# Altium PCB IFX9201_Core.PcbDoc
Units mil, origin at the board's own origin, x right, y up, seen from the top; angles counter-clockwise.
Board outline 1525.39 x 1529.67 mil, 3 copper layers (Top Layer, Mid-Layer 2, Bottom Layer); 16 components, 14 nets, 80 pads, 47 vias.
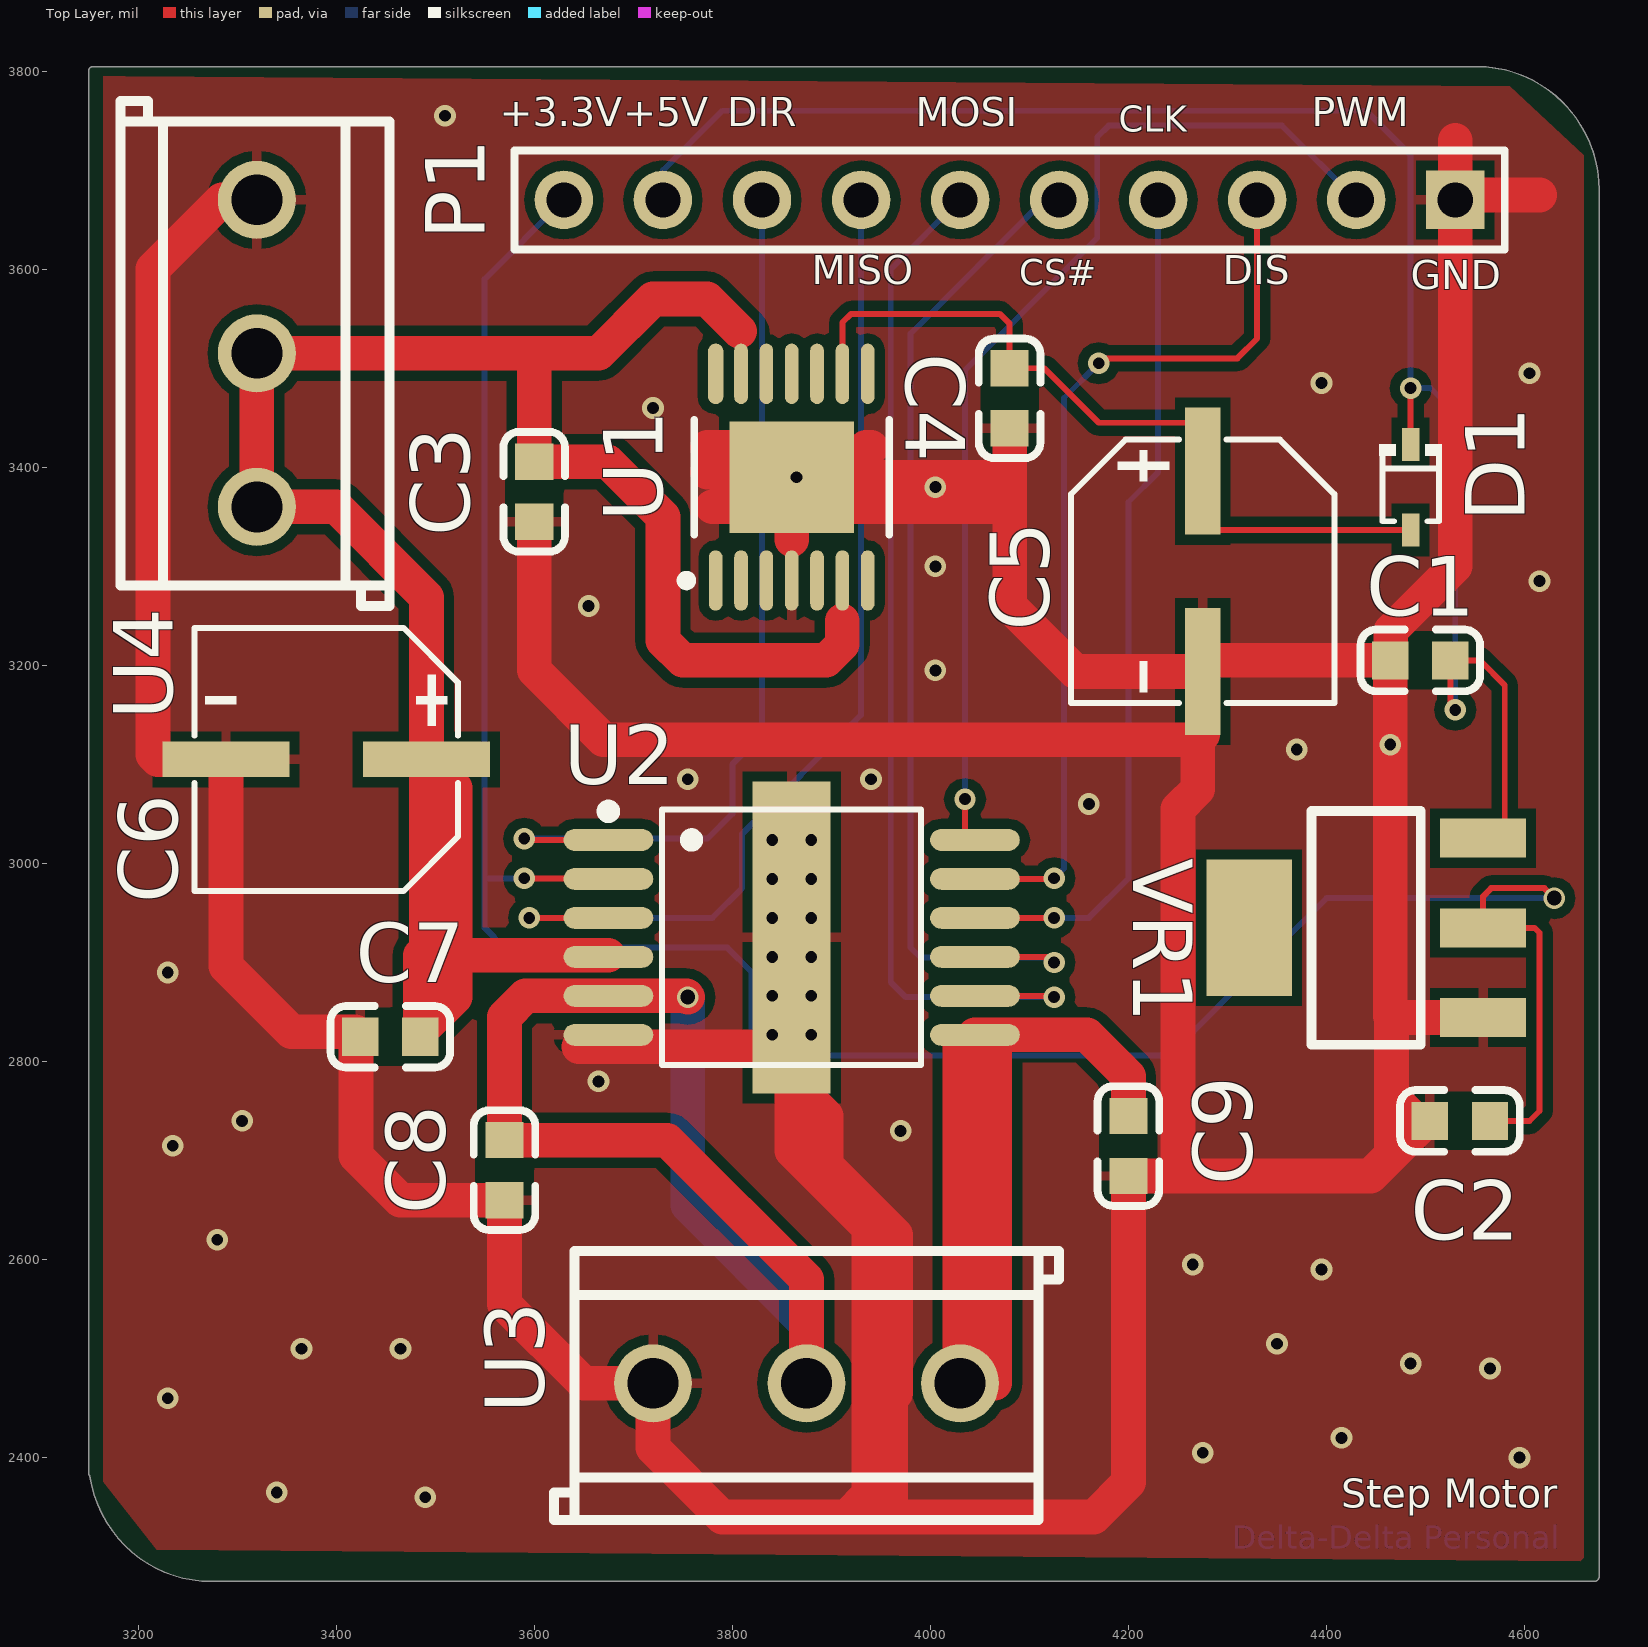
[diagram p0: Top Layer view]
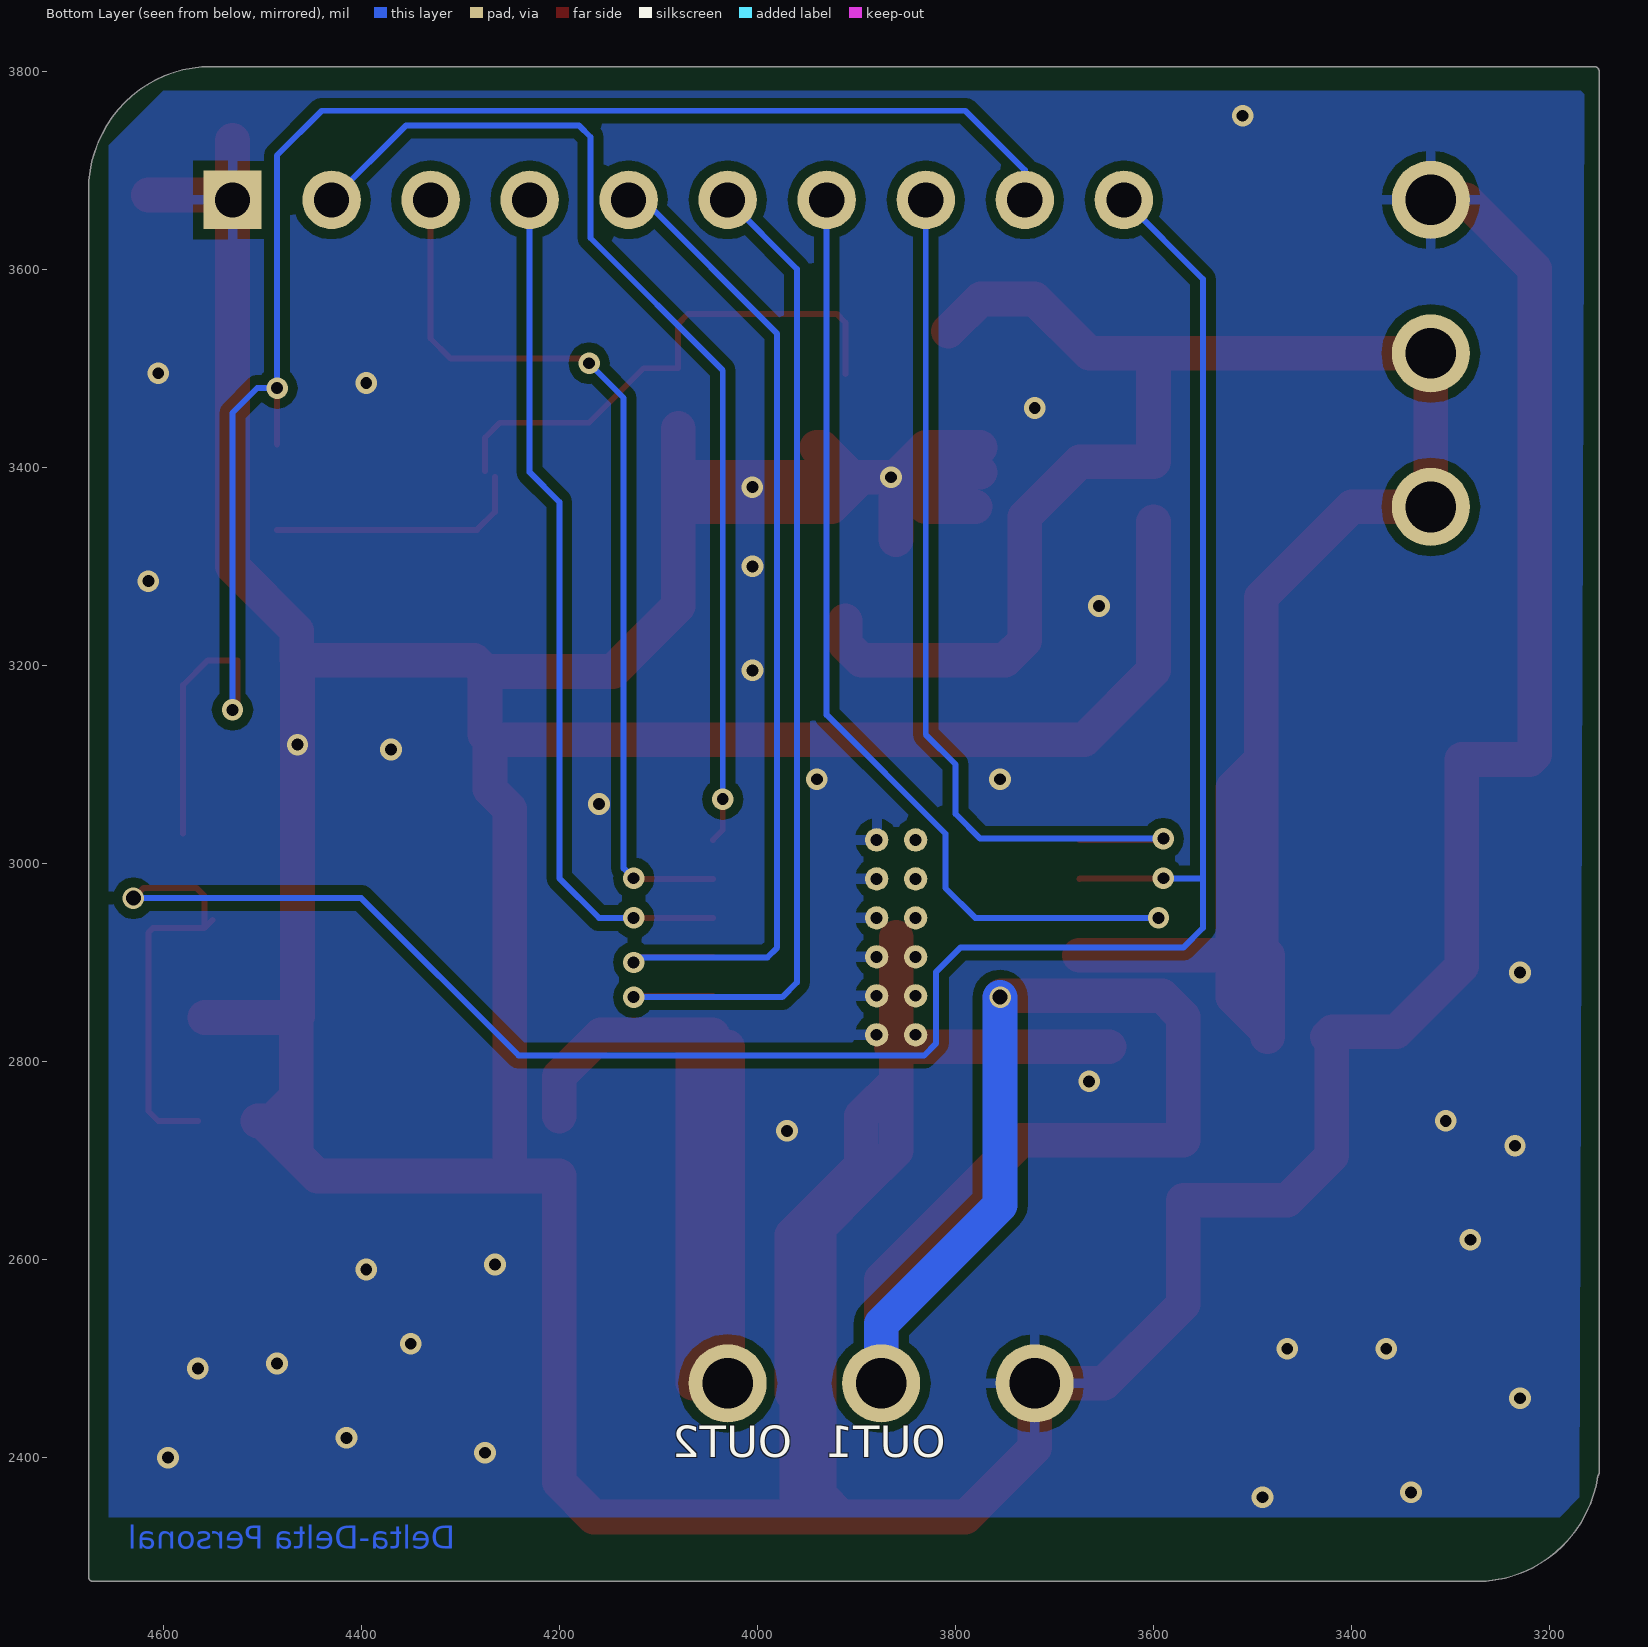
[diagram p1: Bottom Layer view, seen from below]
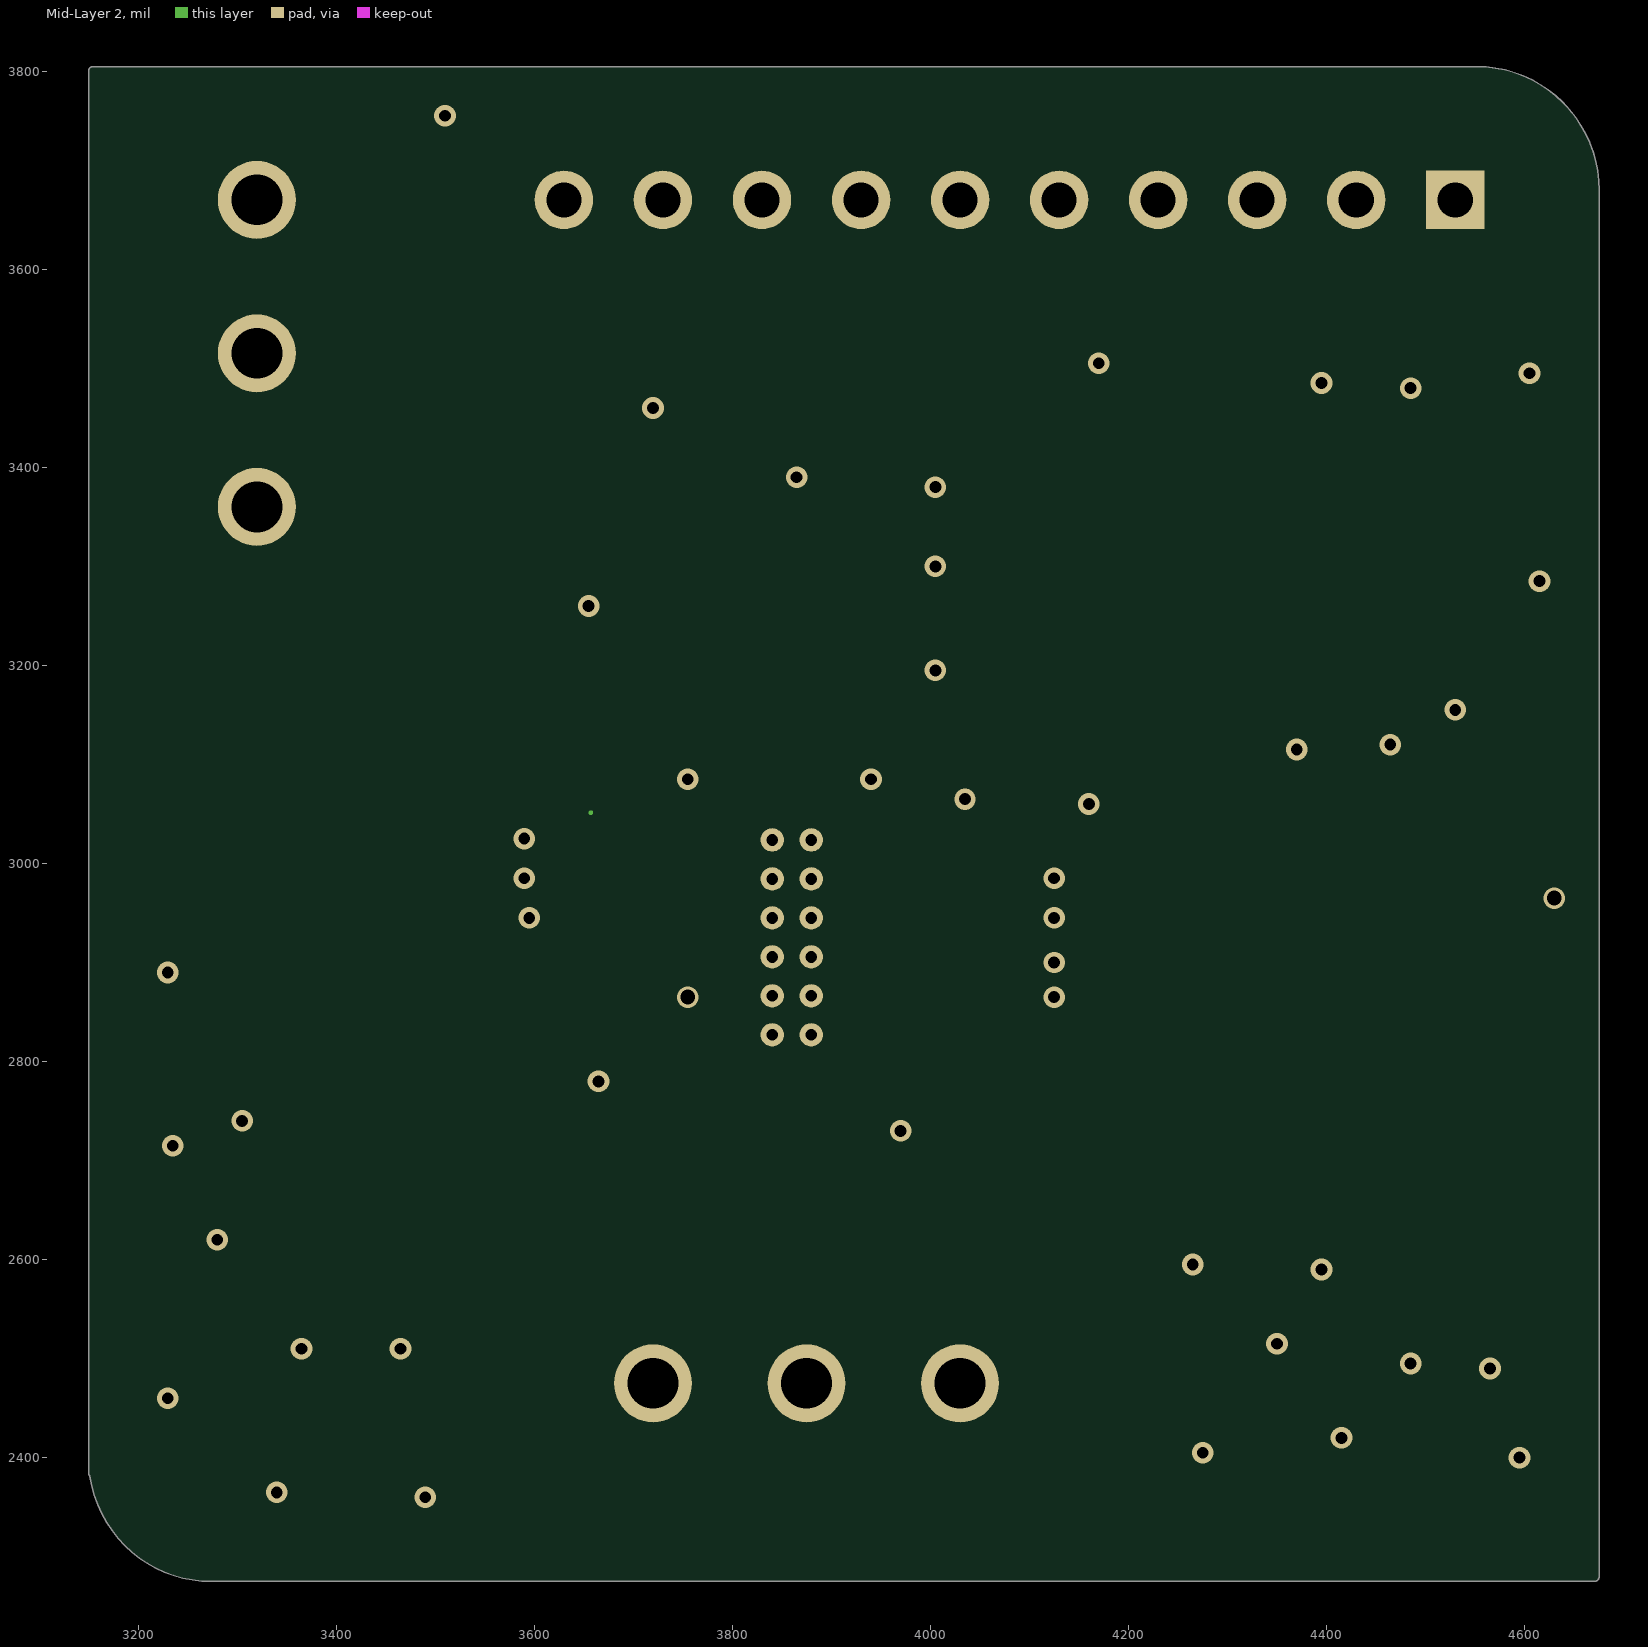
[diagram p2: Mid-Layer 2]
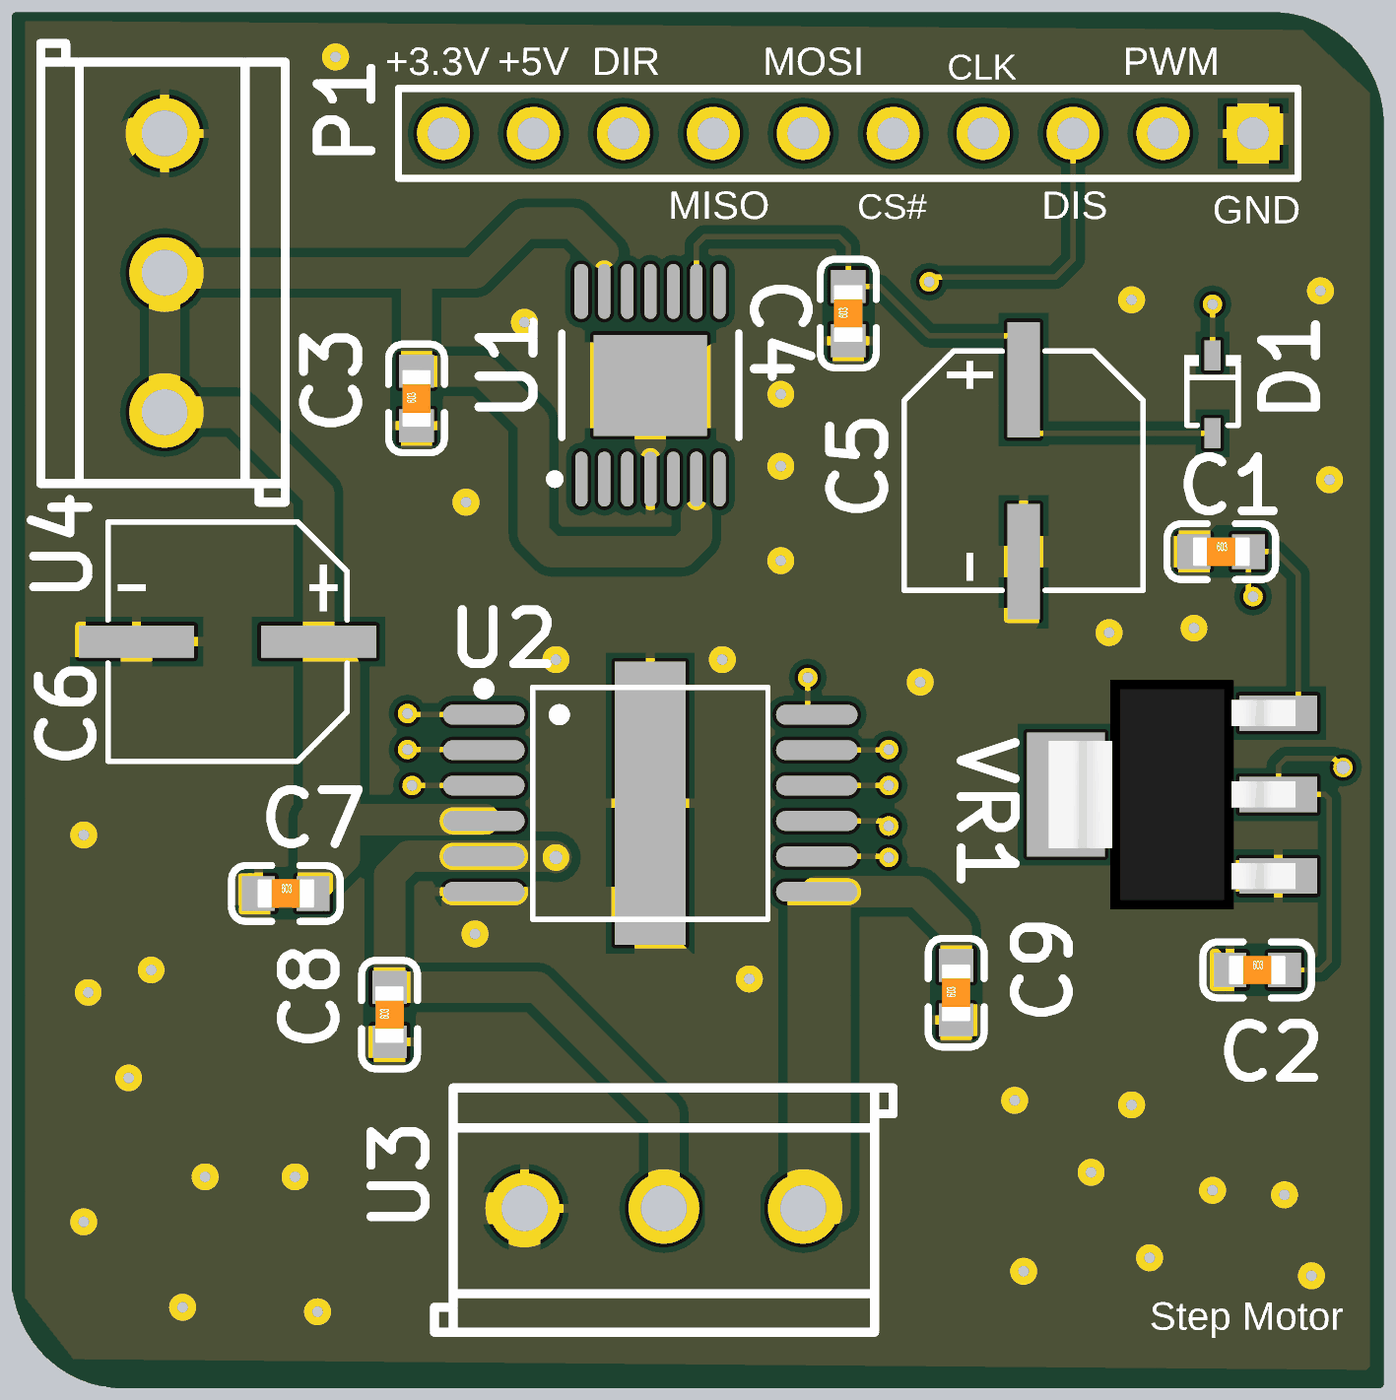
[diagram p3: 3D render of the assembled board from above, using the file's embedded part models]

## Layer stack, top to bottom
Top Solder: solder mask 0.4, Solder Resist, Dk 3.5
Top Layer: signal copper 1.4
Dielectric 1: dielectric 12.6, FR-4, Dk 4.8
Mid-Layer 2: signal copper 1.4
Dielectric2: dielectric 12.6, FR-4, Dk 4.8
Bottom Layer: signal copper 1.4
Bottom Solder: solder mask 0.4, Solder Resist, Dk 3.5

## Board outline
3151.34,2381.57 cw(c3155,2385) 3149.99,2385 3149.99,3799.64 cw(c3155,3799.64) 3155,3804.66 4551.36,3804.66 cw(c4551.36,3681.36) 4638.55,3768.55 cw(c4549.64,3679.64) 4675.37,3679.64 4675.37,2280 cw(c4670.36,2280) 4670.36,2274.99 3273.99,2274.99 cw(c3273.99,2398.28) 3186.81,2311.1 cw(c3275.71,2400)

## Design rules (kind name [scope] priority, off if disabled: settings)
Clearance [All] p1: gap=6 ignorepadtopadclearanceinfootprint=FALSE except(10: Arc-Fill Arc-Poly Arc-Region Track-Fill Track-Poly Track-Region SMDPad-Fill SMDPad-Poly SMDPad-Region THPad-Fill THPad-Poly THPad-Region Via-Fill Via-Poly Via-Region Fill-Fill Fill-Poly Fill-Region Poly-Poly Poly-Region Region-Region)
MinimumSolderMaskSliver [All] p1: minsoldermaskwidth=2
PolygonConnect [All] p1: thpad.connectstyle=Relief thpad.reliefconductorwidth=10 thpad.reliefentries=4 thpad.polygonreliefangle="90 Angle" thpad.airgapwidth=10 smdpad.connectstyle=Relief smdpad.reliefconductorwidth=10 smdpad.reliefentries=4 smdpad.polygonreliefangle="90 Angle" smdpad.airgapwidth=10 via.connectstyle=Direct via.reliefconductorwidth=10 via.reliefentries=4 via.polygonreliefangle="90 Angle" via.airgapwidth=10
RoutingVias [All] p1: holewidth=28 width=50 viastyle="Through Hole" minholewidth=28 minwidth=50 maxholewidth=28 maxwidth=50
SilkToSilkClearance [All] p1: silktosilkclearance=2
SilkToSolderMaskClearance [IsPad] p1: minsilkscreentomaskgap=0 clearancetoexposedcopper=TRUE
SolderMaskExpansion [All] p1: expansion=4
Width Power [InNetClass('Power')] p1: maxlimit=100 minlimit=30 preferedwidth=35
Width [All] p2: maxlimit=8 minlimit=6 preferedwidth=6
27 further rules are at their usual default settings.

## Classes and differential pairs
net class Power: AGND OUT1 OUT2 VS

## Components (designator, comment, footprint, x,y, rotation, side; value= is the part's Value field where it differs from the comment)
C1 "100nF" 0603_C 4494.69,3205 r0 top
C2 "100nF" 0603_C 4534.69,2740 r0 top
C3 "100nF" 0603_C 3600,3375.32 r90 top
C4 "100nF" 0603_C 4080,3469.68 r90 top
C5 "SMD6.3 100uF 16V" CAP-SMD_BD6.3-L6.6-W6.6-FD 4275,3295 r90 top
C6 "SMD 47uF 50V" CAP-SMD_BD6.3-L6.6-W6.6-FD 3390,3105 r0 top
C7 "100nF" 0603_C 3454.68,2825 r0 top
C8 "10nF" 0603_C 3570,2690.32 r90 top
C9 "10nF" 0603_C 4200,2714.68 r90 top
D1 "BAS3010A-03W E6327" SOD-323_L1.8-W1.3-LS2.5-RD 4485,3380 r270 top
P1 "Header 10" HDR1X10 4530,3670 r180 top
U1 "IFX24401EL V50" INF-PG-SSOP-14-1_N 3860,3390 r90 top
U2 "IFX9201SGAUMA1" SO-12_L6.4-W7.5-P1.00-LS10.3-BL-EP 3859.96,2925.31 r270 top
U3 "KF396-3.96-3P" CONN-TH_3P-P3.96_KF396-3.96-3P 3875,2475 r180 top
U4 "KF396-3.96-3P" CONN-TH_3P-P3.96_KF396-3.96-3P 3320,3515 r90 top
VR1 "AMS1117-3.3" SOT-223 4440,2935 r0 top

## Footprints (in the part's own frame and the unit in brackets; to place one, negate y for a bottom-side part, rotate by r counter-clockwise, add the part's x,y. Pads: shape width x height; smd on the part's side, far side on the other; paste and mask are expansions set on the pad)
0603_C [mm]
  rect 0.93x0.98 smd: 1(-0.77,0) 2(0.77,0)
  silkscreen extent -1.53,-0.79 1.54,0.79, body extent -0.8,-0.4 0.8,0.4, height 0.3
CAP-SMD_BD6.3-L6.6-W6.6-FD [mm]
  rect 3.26x0.91 smd: 1(2.57,0) 2(-2.57,0)
  silkscreen extent -3.38,-3.38 3.38,3.38
CONN-TH_3P-P3.96_KF396-3.96-3P [mm]
  round 2 hole 1.3: 1(-3.937,0) 2(0,0) 3(3.937,0)
  silkscreen extent -6.48,-3.4 6.48,3.5
HDR1X10 [mm] "Connector; Header; 10 Position"
  rect 1.5x1.5 hole 0.9: 1(0,0)
  round 1.5 hole 0.9: 2(2.54,0) 3(5.08,0) 4(7.62,0) 5(10.16,0) 6(12.7,0) 7(15.24,0) 8(17.78,0) 9(20.32,0) 10(22.86,0)
  silkscreen extent -1.27,-1.27 24.13,1.27
INF-PG-SSOP-14-1_N [mm] "SOP, 14-Leads, Body 4.9x3.9mm, Pitch 0.65mm, Thermal Pad 3.2x2.85mm, IPC Medium Density"
  oval 1.55x0.35 smd: 1(-2.65,1.95) 2(-2.65,1.3) 3(-2.65,0.65) 4(-2.65,0) 5(-2.65,-0.65) 6(-2.65,-1.3) 7(-2.65,-1.95) 8(2.65,-1.95) 9(2.65,-1.3) 10(2.65,-0.65) 11(2.65,0) 12(2.65,0.65) 13(2.65,1.3)
  oval 1.55x0.4 smd: 14(2.65,1.95)
  rect 2.85x3.2 smd: 15(0,0)
  silkscreen extent -2.77,-2.5 1.48,2.82, body extent -2,-2.5 2,2.5, height 1.7
SO-12_L6.4-W7.5-P1.00-LS10.3-BL-EP [mm]
  oval 0.56x2.3 smd: 1(-2.5,-4.7) 2(-1.5,-4.7) 3(-0.5,-4.7) 4(0.5,-4.7) 5(1.5,-4.7) 6(2.5,-4.7) 7(2.5,4.7) 8(1.5,4.7) 9(0.5,4.7) 10(-0.5,4.7) 11(-1.5,4.7) 12(-2.5,4.7)
  round 0.6 hole 0.3: 13(-2.5,-0.5) 13(-2.5,0.5) 13(-1.5,0.5) 13(-1.5,-0.5) 13(-0.5,0.5) 13(-0.5,-0.5) 13(0.5,0.5) 13(0.5,-0.5) 13(1.5,0.5) 13(1.5,-0.5) 13(2.5,-0.5) 13(2.5,0.5)
  rect 8x2 smd: 13(0,0)
  Mid-Layer 2 circle w0.06: c-3.2,-5.15 r0.03
  silkscreen extent -3.38,-4.85 3.28,3.32
SOD-323_L1.8-W1.3-LS2.5-RD [mm]
  rect 0.845x0.455 smd: 1(-1.098,0) 2(1.098,0)
  silkscreen extent -1.1,-0.8 0.88,0.8
SOT-223 [mm]
  rect 2.2x1 smd: 1(3,-2.3) 2(3,0) 3(3,2.3)
  rect 2.2x3.5 smd: 4(-3,0)
  silkscreen extent -1.4,-3 1.4,3, body extent -3.49,-3.24 3.49,3.24, height 1.64

## Part data
C1 C2 C3 C4 C7: library part "0603 2.7nF (272) 10% 50V", "GCJ188R72A104KA01D", Package=0603, ComponentLink1Description=muRata
C5: library part "SMD6.3 100uF", "UUD1C101MCL1GS", BOM_Manufacturer=Nichicon, BOM_Manufacturer Part=UUD1C101MCL1GS
C6: library part "SMD6.3 100uF", "EEEFT1H470AP", BOM_Manufacturer=PANASONIC, Package=SMD,6.3x5.8mm, BOM_Manufacturer Part=EEEFT1H470AP
C8 C9: library part "0603 2.7nF (272) 10% 50V", "GCM188R72A103KA37D", Package=0603, ComponentLink1Description=muRata
D1: BOM_Manufacturer="Infineon Technologies", BOM_Manufacturer Part="BAS 3010A-03W E6327"
P1: "Header, 10-Pin", LatestRevisionDate=17-Jul-2002, LatestRevisionNote="Re-released for DXP Platform.", Publisher="Altium Limited"
U1: "Low Dropout Voltage Regulator, 5.5?to 42?V Operating, 300 mA, -40 to 125?degC, PG-SSOP-14-1, Reel, Green", Dropout Voltage="250 mV", Manufacturer=Infineon, Max. Output Current="300 mA", Max Peak Reflow Temp=260?degC, Output Voltage="5 V", Supplier Part Number 1=726-IFX24401ELV50, Typical Quiescent Current="20 uA", Accuracy=2.0?%, Automotive Qualified=FALSE, ComponentLink1Description="Manufacturer URL", ComponentLink1URL=http://www.infineon.com/, ComponentLink2Description=Datasheet, ComponentLink2URL=http://www.infineon.com/dgdl/IFX24401_DS_102.pdf?folderId=db3a30431ff988150120802bce1d257a&fileId=db3a304320d39d590120f61fb4d269d5, ComponentLink3Description="Package Specification", ComponentLink3URL=http://www.infineon.com/dgdl/PG-SSOP-14-1%2C-2%2C-3-Package_Overview.pdf?folderId=db3a304319bc939a0119bdaa53bc000b&fileId=db3a30431cdffaa4011ce10d798a0009, DatasheetVersion="Rev. 1.02", Green=TRUE, Halogen-free=TRUE, Max Number Reflow=3, Mounting Technology="Surface Mount", MSL=3, PackageDescription="14-Pin Plastic (Green) Shrink Small Outline Package, 4.9 x 3.9 mm Body, 0.65 mm Pitch", PackageReference=PG-SSOP-14-1, PackageVersion=Oct-08, Packing=Reel, PartNumber="IFX24401EL V50", Regulator Type="Linear->single output", Reset=FALSE, Status Output=FALSE, Supplier 1=Mouser, Supplier 2=Digi-Key, Supplier 3=Digi-Key, Supplier 4=Digi-Key, Supplier Part Number 2="IFX24401EL V50INTR-ND", Supplier Part Number 3="IFX24401EL V50INCT-ND", Supplier Part Number 4="IFX24401EL V50INDKR-ND"
U2: BOM_Manufacturer=Infineon, BOM_Manufacturer Part=IFX9201SGAUMA1
U3 U4: BOM_Manufacturer="Cixi Kefa Elec", BOM_Manufacturer Part=KF396-3.96-3P, BOM_Supplier=LCSC, BOM_Supplier Part=C474895, Contributor=LCSC, spicePre=U, spiceSymbolName=KF396-3.96-3P
VR1: library part "SOT-223 AMS1117-3.3", "低压差线性稳压(LDO)", Package=SOT-223, SuppliersPartNumber=C6186, ComponentLink1Description=供应商链接, ComponentLink1URL=http://www.szlcsc.com/product/details_6652.html, Supplier=LC

## Via types
v1: diameter 22, hole 12, Top Layer to Bottom Layer, 29 vias
v2: diameter 21.65, hole 12, Top Layer to Bottom Layer, 16 vias
v3: diameter 21.65, hole 14.96, Top Layer to Bottom Layer, 2 vias

## Nets (pads, with @x,y where several pads share a name; then routed paths per layer and width w, separated by ;. In a path a pad name is that pad's centre, name@x,y a point inside that pad or via, vN(x,y) a via of type N, cw(c..) or ccw(c..) an arc to the next point about the centre after c; other vN are vias at no path point)
+3.3V: C2.2 P1.10 U2.2 VR1.2 | length 2550.7
  Top Layer w6: v2(3590,2985) 3674.29,2985 U2.2 ; VR1.2@4550,2943.11 VR1.2 ; C2.2 4605,2740 4615,2750 4615,2930 4610,2935 VR1.2 ; v3(4630,2965) 4620,2975 4566.22,2975 4558.11,2966.89 VR1.2
  Bottom Layer w6: v2(3590,2985) 3550,2985 ; P1.10 3550,3590 3550,2985 ; v3(4630,2965) 4400,2965 4241.07,2806.07 3831.65,2806.07 3819.46,2818.26 3819.46,2890.54 3795,2915 3570,2915 3550,2935 3550,2985
+5V: C1.2 D1.1 P1.9 VR1.3 | length 1743.1
  Top Layer w6: D1.1 v2(4485,3480) ; v2(4530,3155) 4525,3160 C1.2 4555,3205 4580,3180 VR1.3@4580,3030
  Bottom Layer w6: P1.9 3730,3700 3790,3760 4440,3760 4485,3715 v2(4485,3480) 4505,3480 4530,3455 v2(4530,3155)
AGND: C1.1 C2.1 C3.1 C4.1 C5.2 C6.2 C7.1 C8.1 C9.1 P1.1 U1.4 U1.15 U2.6 U2.13 U3.3 U4.3 VR1.1 | length 8307.7
  Top Layer w35: U4.3 3284.79,3670 3215,3600.21 3215,3110 3220,3105 C6.2 3288.82,2896.18 3355,2830 3419.37,2830 C7.1 3420,2820.63 3420,2705 3465,2660 C8.1 3570,2555 3650,2475 U3.3 3720,2410 3790,2340 3915,2340 ; C3.1 3600,3195 3670,3125 4270,3125 ; 3645,2815 U2.13@3859.96,2815 ; 3775,3395 U1.15@3855,3395 ; 3775,3420 3830,3420 U1.15@3855,3395 ; 3780,3360 3830,3360 U1.15 ; U2.13@3859.96,2925.32 U2.13@3859.96,2815 ; 3860,3326.68 U1.15 ; U2.13@3865,2815 U2.13@3859.96,2815 ; 3940,3420 3935,3420 3910,3395 U1.15@3910,3390 ; C4.1 4080,3385 ; C2.1 C2.1@4500,2740 ; 4530,3730 P1.1 ; VR1.1 4465.55,2844.45 ; 4615,3675 4535,3675 P1.1 ; U1.15@3855,3395 U1.15 ; U2.13@3859.96,2780.04 3895,2745 3895,2695 ; U2.13@3859.96,2780.04 U2.13@3859.96,2815 ; U2.13@3859.96,2780.04 3859.96,2710.04 3895,2675 ; U1.15 v1(3865,3390) U1.15@3895,3390 ; 3895,2675 3895,2695 ; 3895,2675 3937.87,2632.13 ; 3895,2695 3965,2625 3965,2605 ; U1.15@3895,3390 U1.15@3910,3390 ; U1.15@3895,3390 3925,3360 4080,3360 ; U1.15@3910,3390 4075,3390 4080,3385 ; 3915,2340 3960,2340 ; 3915,2340 3937.87,2362.87 3937.87,2632.13 ; 3937.87,2632.13 3965,2605 ; 3960,2340 4165,2340 4200,2375 C9.1 4250,2684.37 ; 3960,2340 3960,2460 3965,2465 3965,2605 ; 4080,3360 4080,3385 ; 4080,3360 4080,3260 4146.18,3193.82 C5.2 ; 4250,2684.37 4444.37,2684.37 4465.55,2705.55 ; 4250,2684.37 4250,3055 4270,3075 4270,3125 ; 4270,3125 4275,3130 C5.2 ; C5.2 4286.18,3205 C1.1 ; C1.1 v2(4464.37,3120) 4464.37,2845.63 4465.55,2844.45 ; C1.1 4465,3205.63 4465,3235 4530,3300 P1.1 ; 4465.55,2705.55 4465.55,2764.45 ; 4465.55,2705.55 C2.1@4500,2740 ; 4465.55,2764.45 4465.55,2844.45 ; 4465.55,2764.45 4490,2740 C2.1@4500,2740
  other v1: 3490,2360 3340,2365 4595,2400 4275,2405 4415,2420 3230,2460 4565,2490 4485,2495 3365,2510 3465,2510 4350,2515 4395,2590 4265,2595 3970,2730 3665,2780 3230,2890 4160,3060 3755,3085 3940,3085 4370,3115 4005,3195 3655,3260 4615,3285 4005,3300 3720,3460 4395,3485 4605,3495 3510,3755
  other v2: 3280,2620 3235,2715 3305,2740 4005,3380
CLK: P1.4 U2.10 | length 869
  Top Layer w6: U2.10 v2(4125,2945)
  Bottom Layer w6: v2(4125,2945) 4160,2945 4200,2985 4200,3365 4230,3395 P1.4
CS#: P1.5 U2.9 | length 1059.5
  Top Layer w6: U2.9 4119.37,2905.63 v2(4125,2900)
  Bottom Layer w6: v2(4125,2900) 4120,2905 3990,2905 3980,2915 3980,3535 4115,3670 P1.5
DIR: P1.8 U2.1 | length 938.2
  Top Layer w6: v2(3590,3025) 3591.26,3023.74 U2.1
  Bottom Layer w6: v2(3590,3025) 3775,3025 3800,3050 3800,3100 3830,3130 P1.8
DIS: P1.3 U2.11 | length 929.3
  Top Layer w6: U2.11 4124.37,2984.37 v2(4125,2985) ; v2(4170,3505) 4175,3510 4310,3510 4330,3530 P1.3
  Bottom Layer w6: v2(4125,2985) 4135,2995 4135,3470 v2(4170,3505)
MISO: P1.7 U2.3 | length 1052.1
  Top Layer w6: v2(3595,2945) U2.3
  Bottom Layer w6: v2(3595,2945) 3780,2945 3810,2975 3810,3030 3930,3150 P1.7
MOSI: P1.6 U2.8 | length 1070.7
  Top Layer w6: U2.8 4123.74,2866.26 v2(4125,2865)
  Bottom Layer w6: P1.6 3960,3600 3960,2880 3975,2865 v2(4125,2865)
NetC4_2: C4.2 C5.1 D1.2 U1.9 | length 793.8
  Top Layer w6: U1.9 3911.18,3546.18 3920,3555 4070,3555 4080,3545 C4.2 4115,3500 4170,3445 4260,3445 4275,3430 C5.1 ; C5.1@4265,3390 4265,3355 4283.21,3336.79 D1.2
OUT1: C8.2 U2.5 U3.2 | length 1226.7
  Top Layer w35: v3(3755,2865) 3753.74,2866.26 U2.5 3591.26,2866.26 3570,2845 C8.2 3734.37,2720.63 3875,2580 U3.2
  Bottom Layer w35: v3(3755,2865) 3755,2655 3875,2535 U3.2
OUT2: C9.2 U2.7 U3.1 | length 892.4
  Top Layer w35: U3.1 4030,2815 ; U2.7 4158.11,2826.89 4200,2785 C9.2 ; U3.1@4065,2475 4065,2815
PWM: P1.2 U2.12 | length 1066.5
  Top Layer w6: v2(4035,3065) 4035,3033.74 U2.12
  Bottom Layer w6: v2(4035,3065) 4035,3497.94 4168.53,3631.47 4168.53,3733.53 4180,3745 4355,3745 P1.2
VS: C3.2 C6.1 C7.2 U1.6 U1.13 U2.4 U4.1 U4.2 | length 2432.7
  Top Layer w35: C7.2 C7.2@3485,2830 ; U2.4@3674.92,2907.26 3520,2907.26 ; 3807.28,3537.28 3774.57,3570 3720,3570 3665,3515 3600,3515 ; 3911.18,3245 3911.18,3221.18 3895,3205 3750,3205 3730,3225 3730,3350 3674.37,3405.63 C3.2 3600,3515 ; C7.2@3485,2830 3485,2907.26 ; C7.2@3485,2830 3520,2865 3520,2907.26 ; 3485,2907.26 3520,2907.26 ; 3485,2907.26 3491.18,2913.44 C6.1 ; C6.1 3520,3076.18 3520,2907.26 ; C6.1 3491.18,3268.82 3400,3360 U4.1 U4.2 3600,3515
pads on no net: U1.1 U1.2 U1.3 U1.5 U1.7 U1.8 U1.10 U1.11 U1.12 U1.14 VR1.4

## Polygon pours and split planes (outlines as drawn)
AGND on Bottom Layer "Top Layer-No Net" (solid, remove dead copper, pour order 2): 3165,3780 4600,3780 4655,3725 4655,2340 3190,2340 3170,2360
AGND on Top Layer "Top Layer-No Net" (solid, remove dead copper, pour order 0): 3165,3795 3186.81,3795 4585,3785 4660,3715 4660,2295.37 3218.64,2307.18 3165,2375.46 3165,2418.3 3165,2555

## Other copper
Bottom Layer:
  text "Delta-Delta Personal" at 4305,2300 h40

## Silkscreen, mask and mechanical layers (free items; w line width, h text height)
Top Overlay:
  text "+3.3V" at 3565,3735 h50
  text "+5V" at 3690,3735 h50
  text "DIR" at 3795,3735 h50
  text "MOSI" at 3985,3735 h50
  text "PWM" at 4385,3735 h50
  text "CLK" at 4190,3730 h45
  text "MISO" at 3880,3575 h50
  text "CS#" at 4090,3575 h45
  text "DIS" at 4295,3575 h50
  text "GND" at 4485,3570 h50
  text "Step Motor" at 4415,2340 h50
Bottom Overlay:
  text "OUT1" at 3810,2390 h55
  text "OUT2" at 3965,2390 h55
Mechanical 1:
  lines w10: 3155,2385 3155,3799.64 4551.36,3799.64 cw(c4551.36,3681.36) 4635,3765 cw(c4549.64,3679.64) 4670.36,3679.64 4670.36,2280 3273.99,2280 cw(c3273.99,2398.28) 3190.36,2314.64 cw(c3275.71,2400) 3155,2400